# EAGLE board interface_combo (EAGLE 7.2.0)
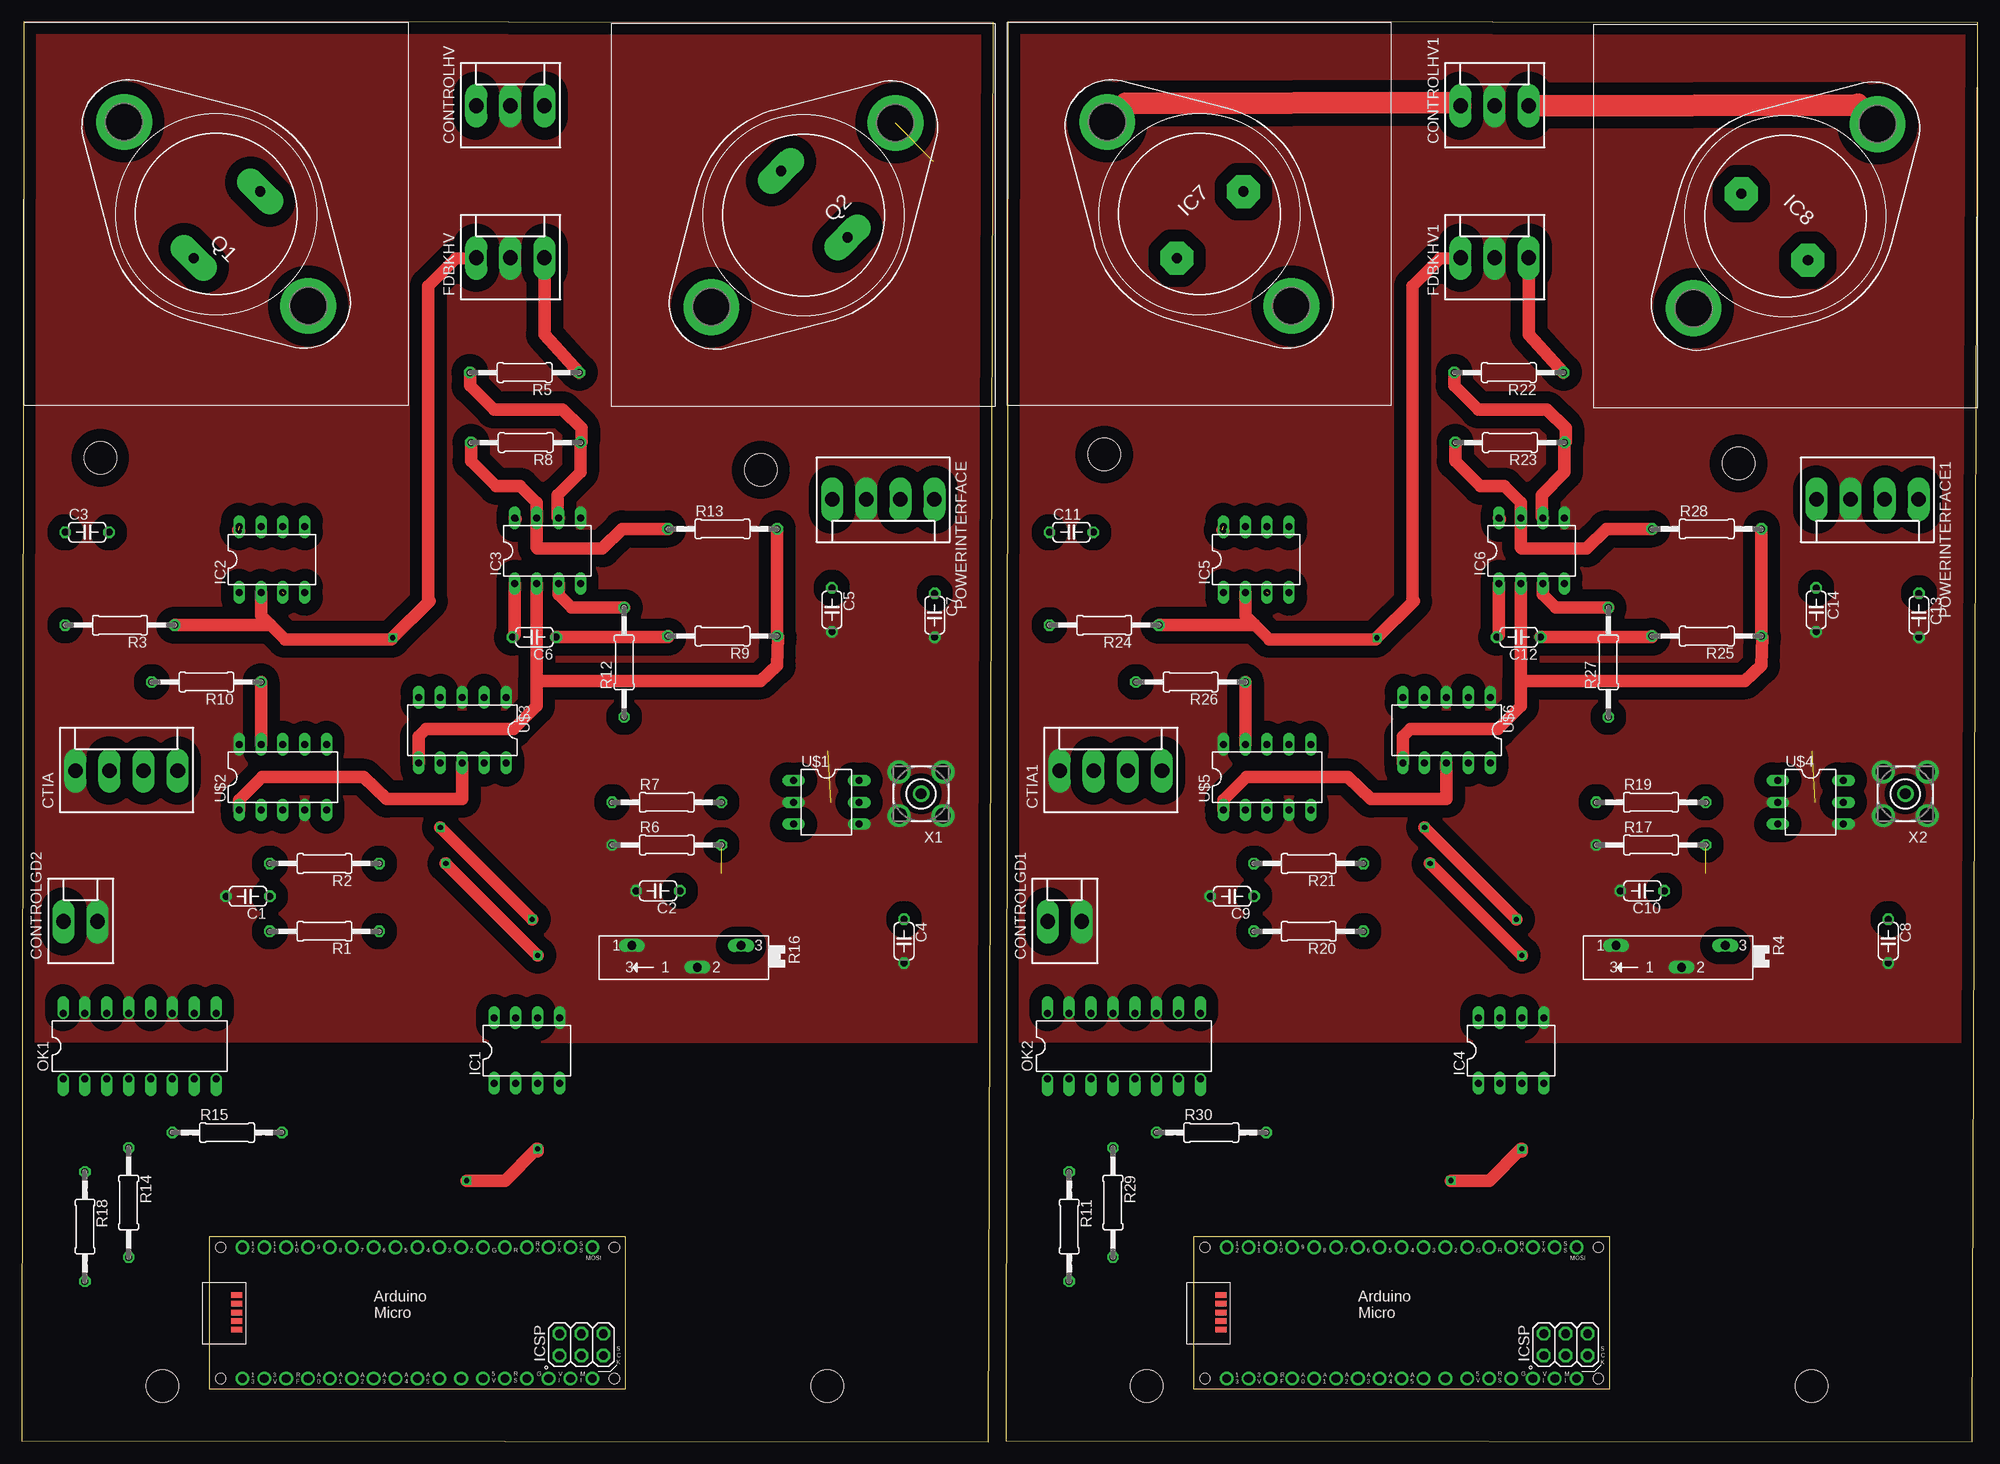
[diagram p0: board, top side]
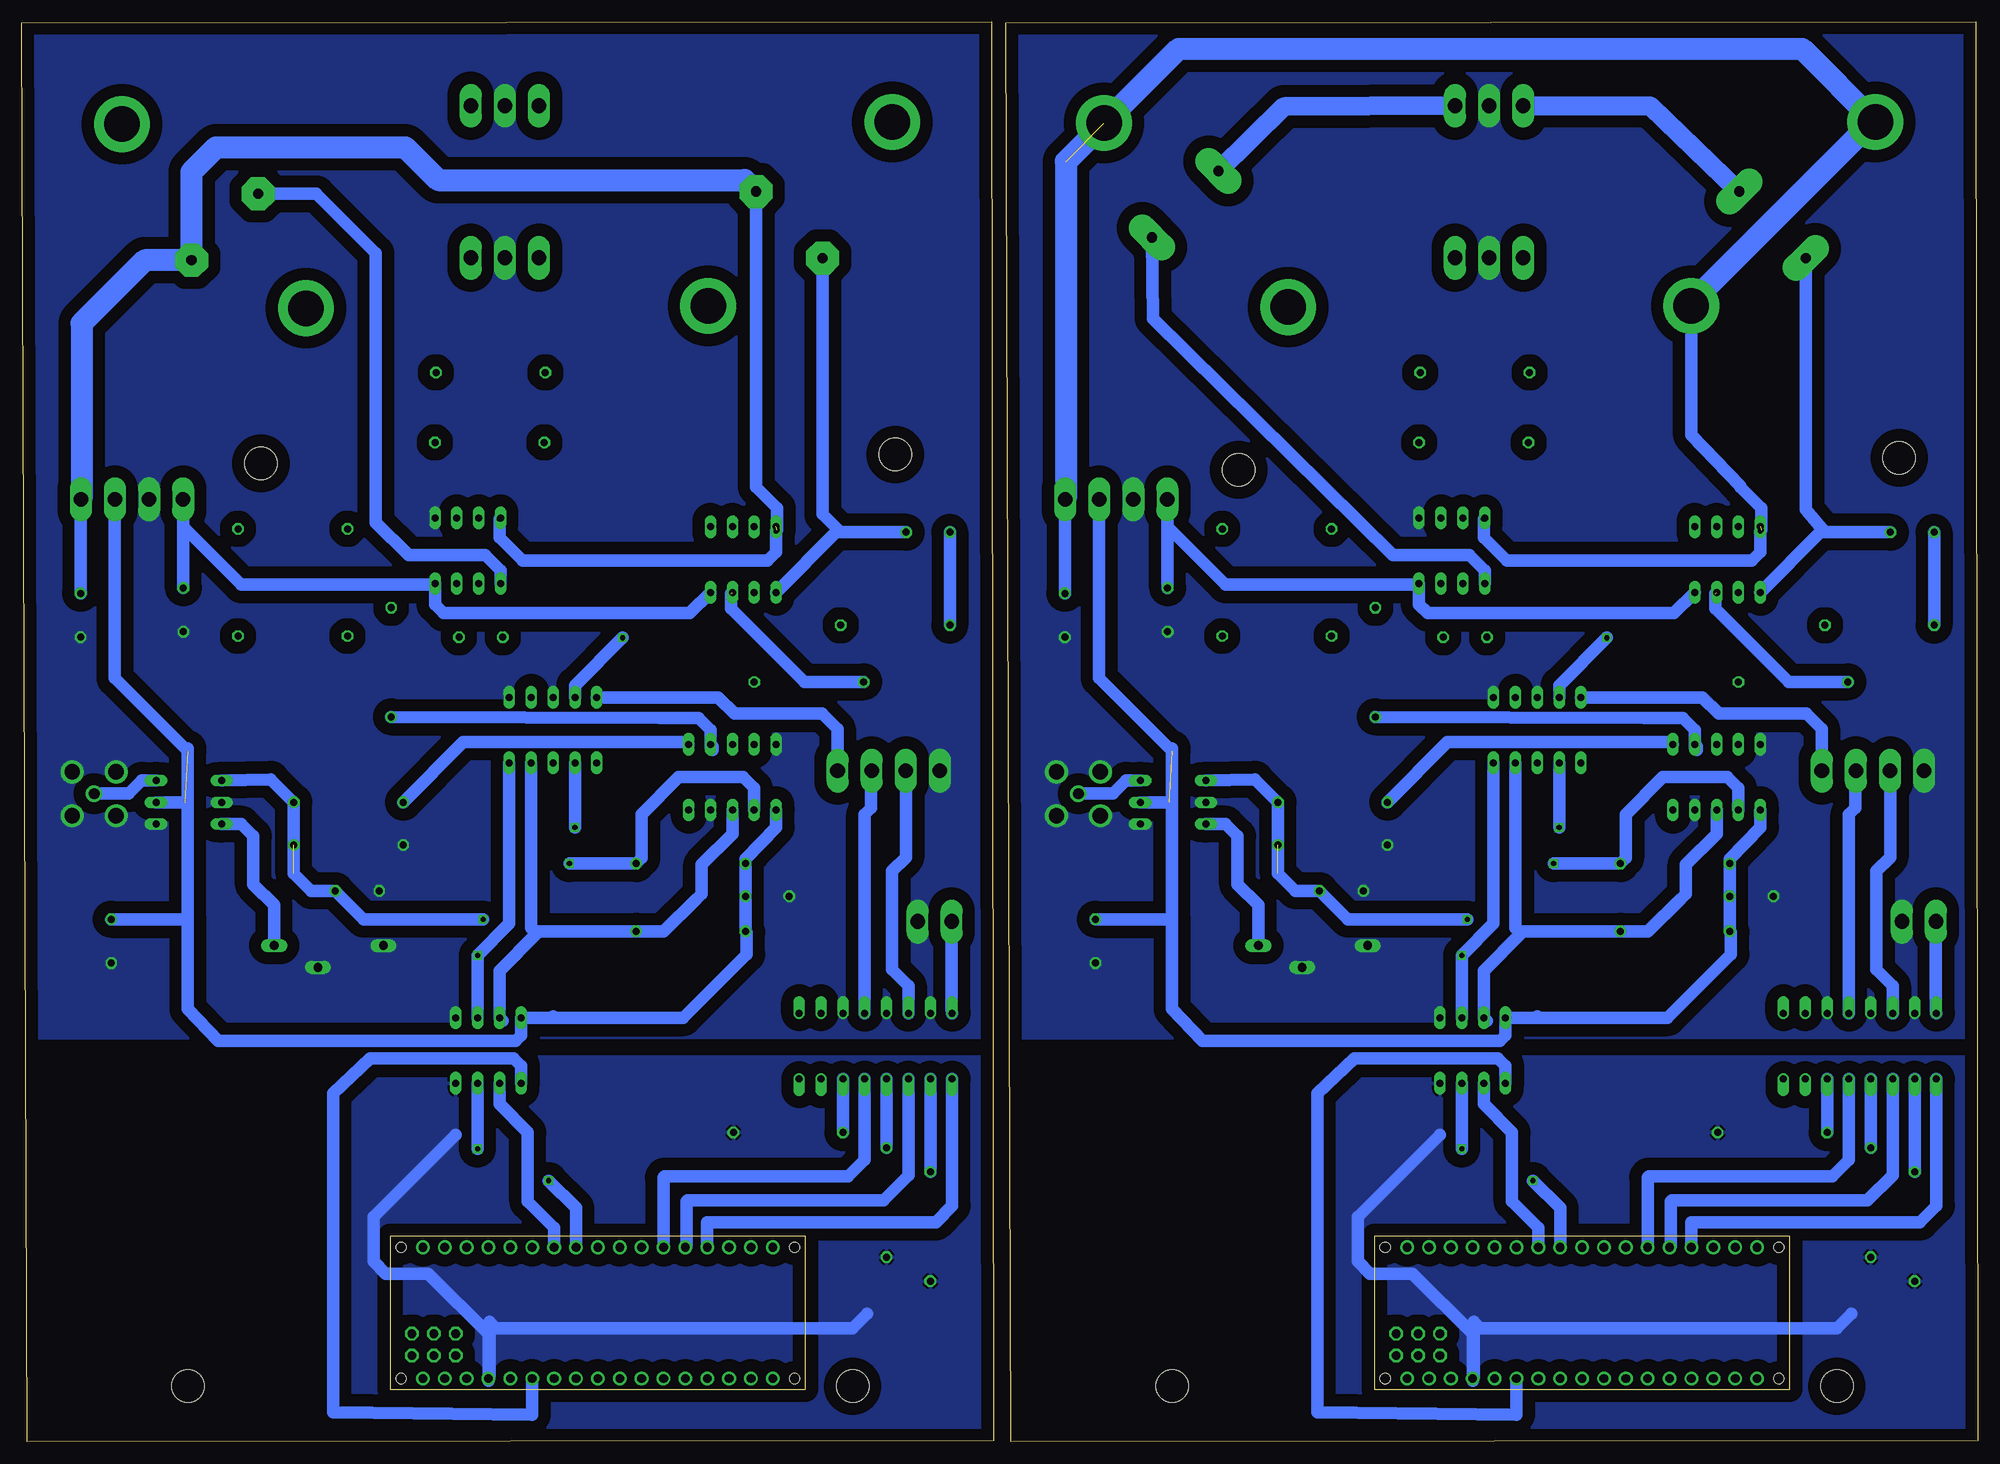
[diagram p1: board, bottom side, seen from below]

Size 227.2 x 164.97 mm. Coordinates in mm from the lower left corner, seen from the top.
Outline: 0,0.13 112.27,0 112.9,164.85 0.25,164.97 0,0.13
Outline: 114.3,0.13 226.57,0 227.2,164.85 114.55,164.97 114.3,0.13
Copper layers (1*16): Top 0.035mm / dielectric 1.5mm / Bottom 0.035mm
Design rules "default": minimum track width 10mil, minimum drill 24mil, track to track 8mil, track to pad 8mil, pad to pad 8mil, via to via 8mil, smd to smd 8mil, copper to edge 40mil, drill to drill 8mil, minimum pad ring 10mil, minimum via ring 8mil, stop-mask expansion 4mil, vias tented up to drill 0mil, thermal gap 10mil
Holes 3.8 mm at 93.6,6.48 16.38,6.48 9.14,114.3 85.85,112.9 207.9,6.48 130.68,6.48 125.73,114.68 199.39,113.66

## Footprints (pad centres in the part's own frame; a part is rotated, then mirrored left to right if it is on the bottom)
C050-024X044 = drill 0.813 octagon: 1 -2.54,0; 2 2.54,0
KK-156-2 = drill 1.7 pad 2.184 long: 1 -1.98,0; 2 1.98,0
KK-156-3 = drill 1.7 pad 2.184 long: 1 -3.96,0; 2 0,0; 3 3.96,0
KK-156-4 = drill 1.7 pad 2.184 long: 1 -5.94,0; 2 -1.98,0; 3 1.98,0; 4 5.94,0
DIL08 = drill 0.813 long: 1 -3.81,-3.81; 2 -1.27,-3.81; 3 1.27,-3.81; 4 3.81,-3.81; 5 3.81,3.81; 6 1.27,3.81; 7 -1.27,3.81; 8 -3.81,3.81
TO3-K02 = drill 1.194 pad 3.81 octagon: 1 -1.778,-5.461; 2 -1.778,5.461 | drill 4.115 pad 6.477: 3 15.113,0; 3@ -15.113,0
DIL16 = drill 0.813 offset: 1 -8.89,-3.81; 2 -6.35,-3.81; 3 -3.81,-3.81; 4 -1.27,-3.81; 5 1.27,-3.81; 6 3.81,-3.81; 7 6.35,-3.81; 8 8.89,-3.81; 9 8.89,3.81; 10 6.35,3.81; 11 3.81,3.81; 12 1.27,3.81; 13 -1.27,3.81; 14 -3.81,3.81; 15 -6.35,3.81; 16 -8.89,3.81
ARDUINO_MICRO = drill 1.016 pad 1.575: 3V3 6.35,1.27; +5V 31.75,1.27; A0 11.43,1.27; A1 13.97,1.27; A2 16.51,1.27; A3 19.05,1.27; A4 21.59,1.27; A5 24.13,1.27; D2 29.21,16.51; D3 26.67,16.51; D4 24.13,16.51; D5 21.59,16.51; D6 19.05,16.51; D7 16.51,16.51; D8 13.97,16.51; D9 11.43,16.51; D10 8.89,16.51; D11 6.35,16.51; D12 3.81,16.51; D13 3.81,1.27; GND 31.75,16.51; GND. 36.83,1.27; MISO] 41.91,1.27; MOSI 44.45,16.51; NC 26.67,1.27; NC. 29.21,1.27; REF 8.89,1.27; RST 34.29,16.51; RST. 34.29,1.27; RX1 36.83,16.51; SCK 44.45,1.27; SS 41.91,16.51; TX1 39.37,16.51; VIN 39.37,1.27 | drill 1.016 pad 1.575 octagon: 5V 40.64,6.477; GND_ 45.72,6.477; MISO. 40.64,3.937; MOSI. 43.18,6.477; RESET.. 45.72,3.937; SCK. 43.18,3.937 | smd 1.27 x 0.635: <USB>+V 3.15,10.947; <USB>D+ 3.15,9.957; <USB>D- 3.15,8.941; <USB>GND 3.15,6.96; <USB>ID 3.15,7.976 | hole 1.2: 1.27,1.27; 1.27,16.51; 46.99,16.51; 46.99,1.27
TO3 = drill 1.194 pad 3.15 long: B -1.778,5.461; E -1.778,-5.461 | drill 4.115 pad 6.477: C 15.113,0; C/ -15.113,0
0207/12 = drill 0.813 octagon: 1 -6.35,0; 2 6.35,0
SP19L = drill 1.016 long: A 5.715,-1.27; E -6.985,-1.27; S -1.905,1.27
DIL06 = drill 0.813 long: DIV 2.54,3.81; GND 0,-3.81; MOD -2.54,-3.81; OUT -2.54,3.81; SET 2.54,-3.81; VCC 0,3.81
DIL10 = drill 0.813 long: 1 -5.08,-3.81; 2 -2.54,-3.81; 3 0,-3.81; 4 2.54,-3.81; 5 5.08,-3.81; 6 5.08,3.81; 7 2.54,3.81; 8 0,3.81; 9 -2.54,3.81; 10 -5.08,3.81
BU-SMA-V = drill 1.27: 1 0,0 | drill 1.778: 2 -2.55,2.55; 3 2.55,2.55; 4 2.55,-2.55; 5 -2.55,-2.55

## Placement (x,y rotation side)
C1  10n  [C050-024X044]  26.29,63.37 180 top
C2  10n  [C050-024X044]  73.91,64.01 180 top
C3  10n  [C050-024X044]  7.62,105.66 0 top
C4  10n  [C050-024X044]  102.49,58.17 270 top
C5  10n  [C050-024X044]  94.11,96.65 270 top
C6  10n  [C050-024X044]  59.56,93.47 180 top
C7  10n  [C050-024X044]  106.05,96.01 270 top
C8  10n  [C050-024X044]  216.79,58.17 270 top
C9  10n  [C050-024X044]  140.59,63.37 180 top
C10  10n  [C050-024X044]  188.21,64.01 180 top
C11  10n  [C050-024X044]  121.92,105.66 0 top
C12  10n  [C050-024X044]  173.86,93.47 180 top
C13  10n  [C050-024X044]  220.34,96.01 270 top
C14  10n  [C050-024X044]  208.41,96.65 270 top
CONTROLGD1  [KK-156-2]  121.16,60.45 0 top
CONTROLGD2  [KK-156-2]  6.86,60.45 0 top
CONTROLHV  [KK-156-3]  56.77,155.19 0 top
CONTROLHV1  [KK-156-3]  171.07,155.19 0 top
CTIA  [KK-156-4]  12.19,77.98 0 top
CTIA1  [KK-156-4]  126.49,77.98 0 top
FDBKHV  [KK-156-3]  56.77,137.54 0 top
FDBKHV1  [KK-156-3]  171.07,137.54 0 top
IC1  ISO1540  [DIL08]  58.67,45.47 0 top
IC2  LT1352PA  [DIL08]  29.08,102.49 0 top
IC3  LT1352PA  [DIL08]  61.09,103.5 0 top
IC4  ISO1540  [DIL08]  172.97,45.47 0 top
IC5  LT1352PA  [DIL08]  143.38,102.49 0 top
IC6  LT1352PA  [DIL08]  175.39,103.5 0 top
IC7  [TO3-K02]  136.78,142.62 135 top
IC8  [TO3-K02]  204.85,142.37 45 top
OK1  PS2501"  [DIL16]  13.72,45.97 0 top
OK2  PS2501"  [DIL16]  128.02,45.97 0 top
PCB1  ARDUINO_MICRO  [ARDUINO_MICRO]  21.84,6.1 0 top
PCB2  ARDUINO_MICRO  [ARDUINO_MICRO]  136.14,6.1 0 top
POWERINTERFACE  [KK-156-4]  100.08,109.47 180 top
POWERINTERFACE1  [KK-156-4]  214.38,109.47 180 top
Q1  2N3055  [TO3]  22.61,142.62 135 top
Q2  2N3055  [TO3]  90.81,142.49 225 top
R1  1.5k  [0207/12]  35.18,59.31 180 top
R2  1.5k  [0207/12]  35.18,67.18 180 top
R3  10k  [0207/12]  11.43,94.87 180 top
R4  100k  [SP19L]  190.88,56.39 180 top
R5  20k  [0207/12]  58.42,124.21 180 top
R6  10k  [0207/12]  74.93,69.34 0 top
R7  40k  [0207/12]  74.93,74.3 0 top
R8  20k  [0207/12]  58.55,116.08 180 top
R9  10k  [0207/12]  81.41,93.6 180 top
R10  10k  [0207/12]  21.46,88.27 180 top
R11  100  [0207/12]  121.67,25.02 270 top
R12  10k  [0207/12]  69.98,90.55 90 top
R13  10k  [0207/12]  81.41,106.05 0 top
R14  100  [0207/12]  12.45,27.81 270 top
R15  100  [0207/12]  23.88,35.94 0 top
R16  100k  [SP19L]  76.58,56.39 180 top
R17  10k  [0207/12]  189.23,69.34 0 top
R18  100  [0207/12]  7.37,25.02 270 top
R19  40k  [0207/12]  189.23,74.3 0 top
R20  1.5k  [0207/12]  149.48,59.31 180 top
R21  1.5k  [0207/12]  149.48,67.18 180 top
R22  20k  [0207/12]  172.72,124.21 180 top
R23  20k  [0207/12]  172.85,116.08 180 top
R24  10k  [0207/12]  125.73,94.87 180 top
R25  10k  [0207/12]  195.71,93.6 180 top
R26  10k  [0207/12]  135.76,88.27 180 top
R27  10k  [0207/12]  184.28,90.55 90 top
R28  10k  [0207/12]  195.71,106.05 0 top
R29  100  [0207/12]  126.75,27.81 270 top
R30  100  [0207/12]  138.18,35.94 0 top
U$1  LTC6992  [DIL06]  93.47,74.3 270 top
U$2  MCP4728DIL  [DIL10]  30.35,77.22 0 top
U$3  ADS1015DIL  [DIL10]  51.18,82.68 180 top
U$4  LTC6992  [DIL06]  207.77,74.3 270 top
U$5  MCP4728DIL  [DIL10]  144.65,77.22 0 top
U$6  ADS1015DIL  [DIL10]  165.48,82.68 180 top
X1  BU-SMA-V  [BU-SMA-V]  104.47,75.29 180 top
X2  BU-SMA-V  [BU-SMA-V]  218.77,75.29 180 top

## Library data of the parts
C1 C9 R11 R14 R15 R18 R29 R30 = rcl
C2-C8 C10-C14 R1-R3 R5-R10 R12 R13 R17 R19-R28 = resistor
CONTROLGD1 CONTROLGD2 CONTROLHV CONTROLHV1 CTIA CTIA1 FDBKHV FDBKHV1 POWERINTERFACE POWERINTERFACE1 = con-molex; OC_FARNELL: unknown; OC_NEWARK: unknown
IC1 IC4 U$3 U$6 = texas
IC2 IC3 IC5 IC6 = linear-technology; OC_FARNELL: unknown; OC_NEWARK: unknown
IC7 IC8 = v-reg
OK1 OK2 = optocoupler
PCB1 PCB2 = E14_Arduino_published
Q1 Q2 = transistor-npn
R4 R16 = pot
U$1 U$4 = linear-technology
U$2 U$5 = microchip
X1 X2 = con-coax; OC_FARNELL: unknown; OC_NEWARK: unknown

## Nets
+15V: C7.1 IC2.8 IC3.8 POWERINTERFACE.1 Q1.C Q1.C/ Q2.C Q2.C/
+15V1: C13.1 IC5.8 IC6.8 IC7.1 IC8.1 POWERINTERFACE1.1
-15V: C5.1 IC2.4 IC3.4 POWERINTERFACE.4
-15V1: C14.1 IC5.4 IC6.4 POWERINTERFACE1.4
A+1: IC4.1 PCB2.+5V
A+5: IC1.1 PCB1.+5V
AGND: IC1.4 PCB1.GND. R14.2 R15.2 R18.2
AGND1: IC4.4 PCB2.GND. R11.2 R29.2 R30.2
CTIA: CTIA.4 U$3.5
CTIA1: CTIA1.4 U$6.5
D1: OK2.5 PCB2.D7
D2: OK2.3 PCB2.D8
D3: PCB2.D4
D4: PCB1.D4
D5: PCB2.D11
D6: PCB2.D10
D7: OK1.5 PCB1.D7
D8: OK1.3 PCB1.D8
D10: PCB1.D10
D11: PCB1.D11
ENSW1: CONTROLGD1.1 OK2.16
ENSW2: CONTROLGD2.1 OK1.16
GND: C1.2 C2.2 C4.2 C5.2 C7.2 CONTROLGD2.2 CONTROLHV.2 CTIA.1 FDBKHV.2 IC1.5 IC3.5 OK1.11 OK1.13 OK1.15 POWERINTERFACE.3 R6.1 R16.A R16.S U$1.DIV U$1.GND U$2.4 U$2.10 U$3.1 U$3.3 X1.2 X1.3 X1.4 X1.5
GND1: C8.2 C9.2 C10.2 C13.2 C14.2 CONTROLGD1.2 CONTROLHV1.2 CTIA1.1 FDBKHV1.2 IC4.5 IC6.5 OK2.11 OK2.13 OK2.15 POWERINTERFACE1.3 R4.A R4.S R17.1 U$4.DIV U$4.GND U$5.4 U$5.10 U$6.1 U$6.3 X2.2 X2.3 X2.4 X2.5
N$1: R7.1 U$2.6
N$2: OK1.4 R14.1
N$3: C3.1 R3.2
N$4: CONTROLHV.1 Q1.E
N$5: CONTROLHV.3 Q2.E
N$6: OK1.6 R15.1
N$7: OK1.2 R18.1
N$8: FDBKHV.3 R5.1
N$9: R4.E U$4.SET
N$10: U$4.OUT X2.1
N$11: IC6.7 R23.2 R28.1
N$12: R16.E U$1.SET
N$13: U$1.OUT X1.1
N$14: IC3.7 R8.2 R13.1
N$15: IC6.3 R27.2
N$16: IC2.3 R10.2
N$17: R19.1 U$5.6
N$18: IC3.3 R12.2
N$19: C3.2 IC2.1 Q1.B
N$20: C6.1 R9.2
N$21: C6.2 IC3.1 Q2.B
N$23: IC3.6 R5.2 R8.1
N$24: R10.1 U$2.9
N$25: R12.1 U$2.7
N$26: U$2.8
N$27: C11.2 IC5.1 IC7.2
N$29: IC6.6 R22.2 R23.1
N$30: C12.2 IC6.1 IC8.2
N$31: C11.1 R24.2
N$32: C12.1 R25.2
N$33: IC5.3 R26.2
N$34: R26.1 U$5.9
N$35: R27.1 U$5.7
N$36: U$5.8
N$37: OK2.4 R29.1
N$38: OK2.6 R30.1
N$39: OK2.2 R11.1
N$40: CONTROLHV1.1 IC7.3
N$41: CONTROLHV1.3 IC8.3
N$42: FDBKHV1.3 R22.1
PWM1: PCB2.D6
PWM2: PCB2.D5
PWM3: OK2.1 PCB2.D9
PWM5: PCB1.D5
PWM6: PCB1.D6
PWM9: OK1.1 PCB1.D9
RDBK1: FDBKHV.1 IC2.2 R3.1 U$3.4
RDBK2: FDBKHV1.1 IC5.2 R24.1 U$6.4
RDBK3: IC3.2 R9.1 R13.2 U$3.6
RDBK4: C2.1 R6.2 R7.2 U$1.MOD U$3.7
RDBK5: IC6.2 R25.1 R28.2 U$6.6
RDBK6: C10.1 R17.2 R19.2 U$4.MOD U$6.7
RESET: CTIA.3 OK1.12
RESET1: CTIA1.3 OK2.12
SAMPLE: CTIA.2 OK1.14
SAMPLE1: CTIA1.2 OK2.14
SCL: IC1.3 PCB1.D3
SCL1: IC4.3 PCB2.D3
SCL_OUT: IC1.6 R2.1 U$2.2 U$3.10
SCL_OUT1: IC4.6 R21.1 U$5.2 U$6.10
SDA: IC1.2 PCB1.D2
SDA1: IC4.2 PCB2.D2
SDA_OUT: IC1.7 R1.1 U$2.3 U$3.9
SDA_OUT1: IC4.7 R20.1 U$5.3 U$6.9
VCC: C1.1 C4.1 IC1.8 POWERINTERFACE.2 R1.2 R2.2 U$1.VCC U$2.1 U$3.8
VCC1: C8.1 C9.1 IC4.8 POWERINTERFACE1.2 R20.2 R21.2 U$4.VCC U$5.1 U$6.8

## Tracks (layer width: path | path; a pad name or v marks a point on that pad's centre or on a via)
+15V  (via drill 0.6)  (2 unrouted)
  Top 1.422: v25.15,105.92 v25.27,105.79 | v57.4,107.19 IC3.8
  Bottom 1.422: v25.15,105.92 25.15,108.46 27.6,110.91 27.6,111.04 33.27,116.97 33.27,131.92 Q1.C/ | v25.27,105.79 25.27,103.38 26.29,102.36 54.74,102.36 57.4,105.03 v57.4,107.19 | POWERINTERFACE.1 106.02,98.58 C7.1
  Bottom 2.54: POWERINTERFACE.1 105.92,109.57 105.92,148.72 92.84,161.8 20.41,161.8 Q1.C | Q1.C/ 33.29,132.31 12.06,153.54
+15V1  (via drill 0.6)  (1 unrouted)
  Top 1.422: v139.45,105.92 v139.57,105.79 | v171.7,107.19 IC6.8
  Bottom 1.422: v139.45,105.92 139.45,108.46 141.9,110.91 IC7.1 | v139.57,105.79 139.57,103.38 140.59,102.36 169.04,102.36 171.7,105.03 v171.7,107.19 | POWERINTERFACE1.1 220.32,98.58 C13.1
  Bottom 2.54: POWERINTERFACE1.1 220.22,109.57 220.22,129.92 212.89,137.25 IC8.1 207.46,147.51 204.6,150.37 182.63,150.37 178.82,146.56 143.23,146.56 IC7.1
-15V
  Bottom 1.422: IC2.4 35.31,96.27 63.88,96.27 64.9,97.28 IC3.4 65.02,99.57 87.38,99.57 94.14,106.33 POWERINTERFACE.4 94.11,109.44 C5.1
-15V1
  Bottom 1.422: IC5.4 149.61,96.27 178.18,96.27 179.2,97.28 IC6.4 179.32,99.57 201.68,99.57 208.44,106.33 POWERINTERFACE1.4 208.41,109.44 C14.1
A+1
  Bottom 1.422: PCB2.+5V 167.89,3.17 191.01,3.43 191.01,40.51 186.69,44.58 170.05,44.58 169.16,43.69 IC4.1
A+5
  Bottom 1.422: PCB1.+5V 53.59,3.17 76.71,3.43 76.71,40.51 72.39,44.58 55.75,44.58 54.86,43.69 IC1.1
AGND
  Bottom 1.422: 62.48,35.69 72.01,26.16 72.01,20.95 70.61,19.56 65.66,19.56 58.67,12.57 PCB1.GND. | PCB1.GND. 58.67,7.11 | 14.73,14.86 16.38,13.21 57.78,13.21 58.55,13.97 58.55,7.49 PCB1.GND.
  pour Bottom (isolate 1.422): -0.13,0.25 112.52,0.25 112.52,44.83 0,44.7
AGND1
  Bottom 1.422: 176.78,35.69 186.31,26.16 186.31,20.95 184.91,19.56 179.96,19.56 172.97,12.57 PCB2.GND. | PCB2.GND. 172.97,7.11 | 129.03,14.86 130.68,13.21 172.09,13.21 172.85,13.97 172.85,7.49 PCB2.GND.
  pour Bottom (isolate 1.422): 114.17,0.25 226.82,0.25 226.82,44.83 114.3,44.7
CTIA  (via drill 0.6)
  Top 1.422: v18.16,78.01 CTIA.4
  Bottom 1.422: U$3.5 32,86.49 30.1,84.58 19.94,84.58 18.16,82.8 v18.16,78.01
CTIA1  (via drill 0.6)
  Top 1.422: v132.46,78.01 CTIA1.4
  Bottom 1.422: U$6.5 146.3,86.49 144.4,84.58 134.24,84.58 132.46,82.8 v132.46,78.01
D1
  Bottom 1.422: OK2.5 129.29,32.77 131.19,30.86 152.53,30.86 152.65,30.73 PCB2.D7
D2
  Bottom 1.422: OK2.3 124.21,30.99 127.13,28.07 149.86,28.07 149.99,27.94 149.99,22.73 PCB2.D8
D7
  Bottom 1.422: OK1.5 14.99,32.77 16.89,30.86 38.23,30.86 38.35,30.73 PCB1.D7
D8
  Bottom 1.422: OK1.3 9.91,30.99 12.83,28.07 35.56,28.07 35.69,27.94 35.69,22.73 PCB1.D8
ENSW1
  Bottom 1.422: CONTROLGD1.1 119.18,50.22 OK2.16
ENSW2
  Bottom 1.422: CONTROLGD2.1 4.88,50.22 OK1.16
GND
  pour Bottom (isolate 1.422, no thermals): 0.25,164.72 112.78,164.72 112.27,46.86 0,46.99
  pour Top (isolate 1.422, no thermals): 0.25,164.85 112.65,164.72 112.39,46.48 0,46.61
GND1
  pour Bottom (isolate 1.422, no thermals): 114.55,164.72 227.08,164.72 226.57,46.86 114.3,46.99
  pour Top (isolate 1.422, no thermals): 114.55,164.85 226.95,164.72 226.69,46.48 114.3,46.61
N$1
  Bottom 1.422: R7.1 61.59,81.28 35.69,81.28 U$2.6
N$2
  Bottom 1.422: OK1.4 R14.1
N$3
  Bottom 1.422: C3.1 R3.2
N$4
  Bottom 2.184: CONTROLHV.1 38.07,155.19 Q1.E
N$5
  Bottom 2.184: CONTROLHV.3 80.62,155.07 Q2.E
N$6
  Bottom 1.422: OK1.6 R15.1
N$7
  Bottom 1.422: R18.1 OK1.2
N$8
  Top 1.422: FDBKHV.3 60.73,128.63 R5.1
N$9
  Bottom 1.422: R4.E 197.87,62.36 200.28,64.77 200.28,70.36 201.68,71.75 U$4.SET
N$10
  Bottom 1.422: X2.1 218.49,75.31 214.76,75.31 213.23,76.83 U$4.OUT
N$11
  Top 1.422: R28.1 184.02,106.05 181.74,103.76 174.24,103.76 174.12,103.89 IC6.7 174.12,109.09 172.21,111 169.42,111 166.5,113.92 R23.2
N$12
  Bottom 1.422: R16.E 83.57,62.36 85.98,64.77 85.98,70.36 87.38,71.75 U$1.SET
N$13
  Bottom 1.422: X1.1 104.19,75.31 100.46,75.31 98.93,76.83 U$1.OUT
N$14
  Top 1.422: R13.1 69.72,106.05 67.44,103.76 59.94,103.76 59.82,103.89 IC3.7 59.82,109.09 57.91,111 55.12,111 52.2,113.92 R8.2
N$15
  Top 1.422: IC6.3 176.66,98.42 178.18,96.9 R27.2
N$16  (1 unrouted)
  Bottom 1.422: 30.48,98.55 30.48,96.77 21.97,88.27 R10.2
N$17
  Bottom 1.422: R19.1 175.9,81.28 149.99,81.28 U$5.6
N$18
  Top 1.422: IC3.3 62.36,98.42 63.88,96.9 R12.2
N$19
  Bottom 1.422: IC2.1 18.29,105.66 18.29,105.79 18.16,105.66 17.78,105.66 | C3.2 17.78,105.66 | 17.78,105.66 20,108.27 Q1.B
N$20
  Top 1.422: C6.1 75.06,93.47 R9.2
N$21
  Top 1.422: IC3.1 57.28,93.73 C6.2
  Bottom 1.422: IC3.1 57.28,101.22 59.05,103 67.94,103 95.8,130.47 Q2.B
N$23
  Top 1.422: IC3.6 62.23,107.44 62.23,109.98 64.9,112.65 R8.1 65.02,116.2 65.02,117.73 62.87,119.89 54.86,119.89 52.07,122.68 R5.2
N$24
  Top 1.422: R10.1 U$2.9
N$25
  Bottom 1.422: R12.1 38.73,84.07 34.29,84.07 32.89,82.68 U$2.7 | U$2.7 32.89,80.64 32.64,80.39 32.64,80.77 U$2.7
N$27
  Bottom 1.422: IC5.1 132.59,105.66 132.59,105.79 132.46,105.66 132.08,105.66 | C11.2 132.08,105.66 | IC7.2 134.18,107.76 132.08,105.66
N$29
  Top 1.422: IC6.6 176.53,107.44 176.53,109.98 179.2,112.65 R23.1 179.32,116.2 179.32,117.73 177.16,119.89 169.16,119.89 166.37,122.68 R22.2
N$30
  Top 1.422: IC6.1 171.58,93.73 C12.2
  Bottom 1.422: IC6.1 171.58,101.22 173.35,103 182.25,103 186.06,106.81 186.06,121.54 186.06,122.43 186.06,138.05 192.98,144.97 IC8.2
N$31
  Bottom 1.422: C11.1 R24.2
N$32
  Top 1.422: C12.1 189.36,93.47 R25.2
N$33  (1 unrouted)
  Bottom 1.422: 144.78,98.55 144.78,96.77 136.27,88.27 R26.2
N$34
  Top 1.422: R26.1 U$5.9
N$35
  Bottom 1.422: R27.1 153.03,84.07 148.59,84.07 147.19,82.68 U$5.7 | U$5.7 147.19,80.64 146.94,80.39 146.94,80.77 U$5.7
N$37
  Bottom 1.422: OK2.4 R29.1
N$38
  Bottom 1.422: OK2.6 R30.1
N$39
  Bottom 1.422: R11.1 OK2.2
N$40
  Top 2.54: CONTROLHV1.1 167,155.55 128.23,155.45 IC7.3
N$41
  Top 2.54: CONTROLHV1.3 213.27,155.32 IC8.3
N$42
  Top 1.422: FDBKHV1.3 175.03,128.63 R22.1
PWM3
  Bottom 1.422: PCB2.D9 147.57,25.53 121.03,25.53 119.13,27.43 OK2.1
PWM9
  Bottom 1.422: PCB1.D9 33.27,25.53 6.73,25.53 4.83,27.43 OK1.1
RDBK1  (via drill 0.6)
  Top 1.422: 28.89,94.93 30.61,93.22 42.93,93.22 v43.12,93.41 47.37,97.66 47.24,97.79 47.24,134.24 50.42,137.41 FDBKHV.1 | 28.89,94.93 27.81,96.01 IC2.2 27.81,96.9 | R3.1 28.83,94.87 28.89,94.93
  Bottom 1.422: U$3.4 48.64,87.88 v43.12,93.41
RDBK2  (via drill 0.6)
  Top 1.422: 143.19,94.93 144.91,93.22 157.23,93.22 v157.42,93.41 161.67,97.66 161.54,97.79 161.54,134.24 164.72,137.41 FDBKHV1.1 | 143.19,94.93 142.11,96.01 IC5.2 142.11,96.9 | R24.1 143.13,94.87 143.19,94.93
  Bottom 1.422: U$6.4 162.94,87.88 v157.42,93.41
RDBK3
  Top 1.422: IC3.2 59.82,88.39 | U$3.6 46.1,81.91 46.99,82.8 57.15,82.8 59.82,85.47 59.82,88.39 | R13.2 R9.1 87.88,93.47 87.76,90.17 85.85,88.39 59.82,88.39
RDBK4  (via drill 0.6)  (1 unrouted)
  Top 1.422: v48.64,71.37 v59.31,60.71
  Bottom 1.422: U$3.7 v48.64,71.37 | v59.31,60.71 73.15,60.71 C2.1 79.25,64.01 81.28,66.04 R7.2 83.95,76.96 U$1.MOD
RDBK5
  Top 1.422: IC6.2 174.12,88.39 | U$6.6 160.4,81.91 161.29,82.8 171.45,82.8 174.12,85.47 174.12,88.39 | R28.2 R25.1 202.18,93.47 202.06,90.17 200.15,88.39 174.12,88.39
RDBK6  (via drill 0.6)  (1 unrouted)
  Top 1.422: v162.94,71.37 v173.61,60.71
  Bottom 1.422: U$6.7 v162.94,71.37 | v173.61,60.71 187.45,60.71 C10.1 193.55,64.01 195.58,66.04 R19.2 198.25,76.96 U$4.MOD
RESET
  Bottom 1.422: OK1.12 14.99,72.9 14.22,73.66 14.22,77.93 CTIA.3
RESET1
  Bottom 1.422: OK2.12 129.29,72.9 128.52,73.66 128.52,77.93 CTIA1.3
SAMPLE
  Bottom 1.422: CTIA.2 10.21,67.89 11.81,66.29 11.81,54.86 9.91,52.96 OK1.14
SAMPLE1
  Bottom 1.422: CTIA1.2 124.51,67.89 126.11,66.29 126.11,54.86 124.21,52.96 OK2.14
SCL  (via drill 0.6)
  Top 1.422: v51.69,30.35 56.13,30.35 59.82,34.04 59.94,33.78 v59.94,34.04
  Bottom 1.422: PCB1.D3 48.51,27.18 v51.69,30.35 | v59.94,34.04 IC1.3
SCL1  (via drill 0.6)
  Top 1.422: v165.99,30.35 170.43,30.35 174.12,34.04 174.24,33.78 v174.24,34.04
  Bottom 1.422: PCB2.D3 162.81,27.18 v165.99,30.35 | v174.24,34.04 IC4.3
SCL_OUT  (via drill 0.6)
  Top 1.422: v49.28,67.18 v59.94,56.52
  Bottom 1.422: v49.28,67.18 R2.1 40.89,67.82 40.89,72.9 36.58,77.22 29.08,77.22 27.81,75.95 U$2.2 | IC1.6 v59.94,56.52 56.26,60.2 U$3.10
SCL_OUT1  (via drill 0.6)
  Top 1.422: v163.58,67.18 v174.24,56.52
  Bottom 1.422: v163.58,67.18 R21.1 155.19,67.82 155.19,72.9 150.88,77.22 143.38,77.22 142.11,75.95 U$5.2 | IC4.6 v174.24,56.52 170.56,60.2 U$6.10
SDA
  Bottom 1.422: PCB1.D2 51.05,24.89 54.1,27.94 54.1,35.94 57.4,39.24 IC1.2
SDA1
  Bottom 1.422: PCB2.D2 165.35,24.89 168.4,27.94 168.4,35.94 171.7,39.24 IC4.2
SDA_OUT
  Bottom 1.422: 53.09,59.05 57.4,54.74 IC1.7 57.02,48.9 | 53.09,59.05 52.83,59.31 R1.1 38.35,59.31 34.54,62.99 33.91,63.63 33.91,67.06 30.35,70.61 U$2.3 | U$3.9 53.72,59.69 53.09,59.05
SDA_OUT1
  Bottom 1.422: 167.39,59.05 171.7,54.74 IC4.7 171.32,48.9 | 167.39,59.05 167.13,59.31 R20.1 152.65,59.31 148.84,62.99 148.21,63.63 148.21,67.06 144.65,70.61 U$5.3 | U$6.9 168.02,59.69 167.39,59.05
VCC  (1 unrouted)
  Top 1.422: U$3.8 51.18,74.68 42.42,74.68 39.75,77.22 27.94,77.22 25.27,74.55 U$2.1
  Bottom 1.422: C4.1 93.6,60.71 | 93.6,60.71 93.6,80.26 | 93.6,80.26 93.6,80.52 | 93.6,60.71 93.6,50.29 90.04,46.61 55.5,46.61 54.86,47.24 IC1.8 51.05,49.28 | 51.05,49.28 36.07,49.28 28.7,56.64 28.7,59.18 R1.2 C1.1 R2.2 28.83,67.69 25.27,71.37 U$2.1 | 51.18,49.4 51.05,49.28 | U$1.VCC 93.98,74.3 | POWERINTERFACE.2 102.06,88.72 93.6,80.26
VCC1  (1 unrouted)
  Top 1.422: U$6.8 165.48,74.68 156.72,74.68 154.05,77.22 142.24,77.22 139.57,74.55 U$5.1
  Bottom 1.422: C8.1 207.9,60.71 | 207.9,60.71 207.9,80.26 | 207.9,80.26 207.9,80.52 | 207.9,60.71 207.9,50.29 204.34,46.61 169.8,46.61 169.16,47.24 IC4.8 165.35,49.28 | 165.35,49.28 150.37,49.28 143,56.64 143,59.18 R20.2 C9.1 R21.2 143.13,67.69 139.57,71.37 U$5.1 | 165.48,49.4 165.35,49.28 | U$4.VCC 208.28,74.3 | POWERINTERFACE1.2 216.36,88.72 207.9,80.26